# Altium PCB Power.PcbDoc
Units mm, origin at the board's own origin, x right, y up, seen from the top; angles counter-clockwise.
Board outline 232.5 x 115 mm, 2 copper layers (Top Layer, Bottom Layer); 44 components, 32 nets, 226 pads, 10 vias.
Unrouted connection lines stored in the file: 38.
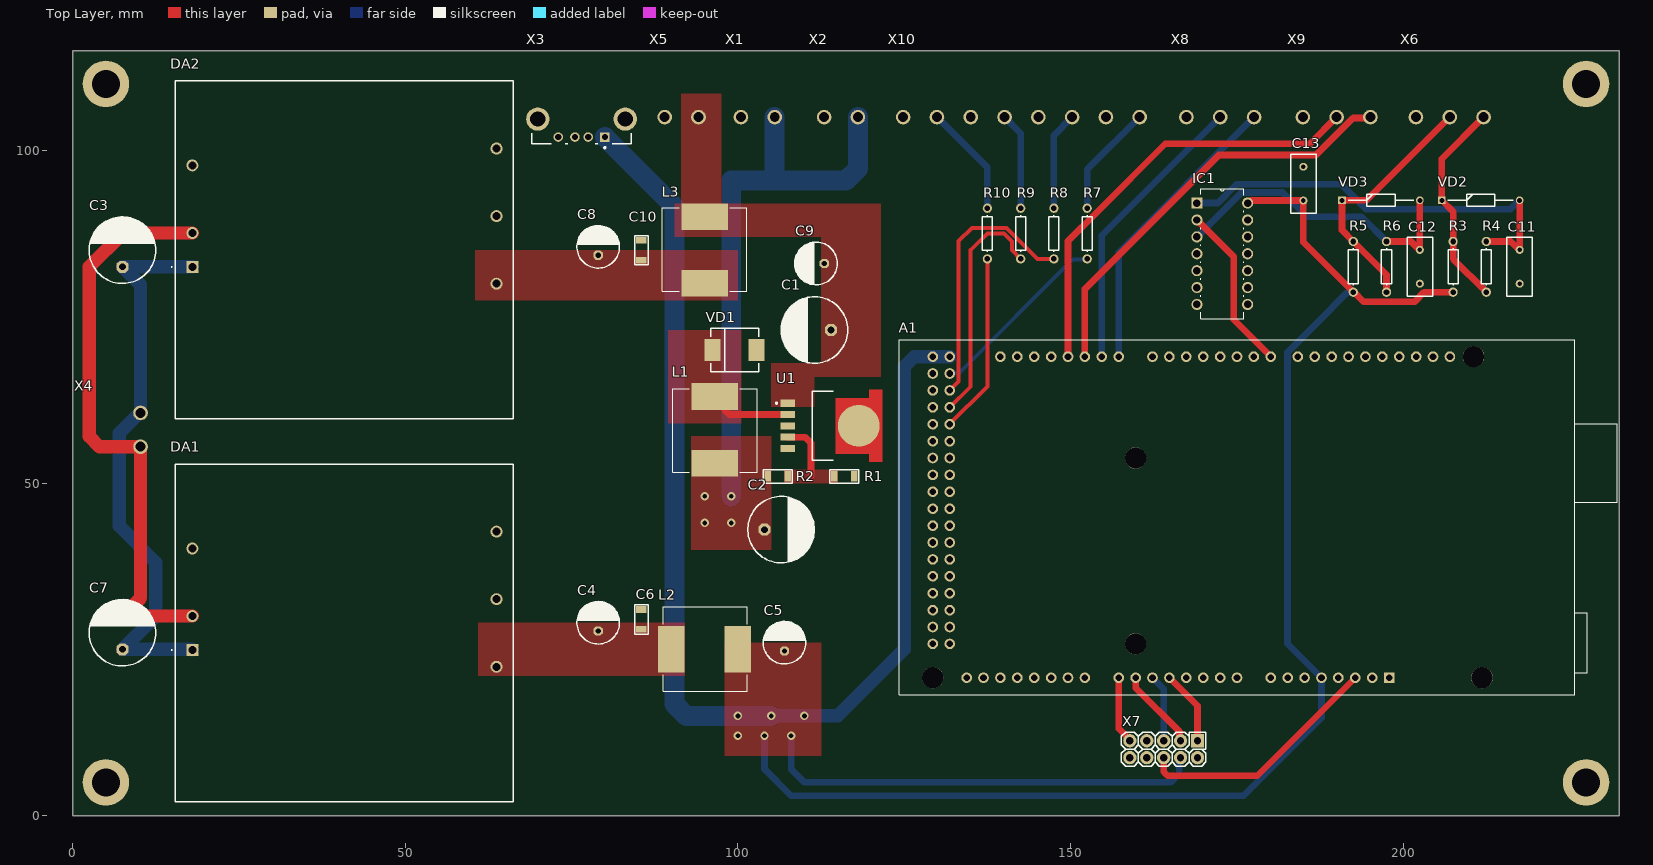
[diagram p0: Top Layer view]
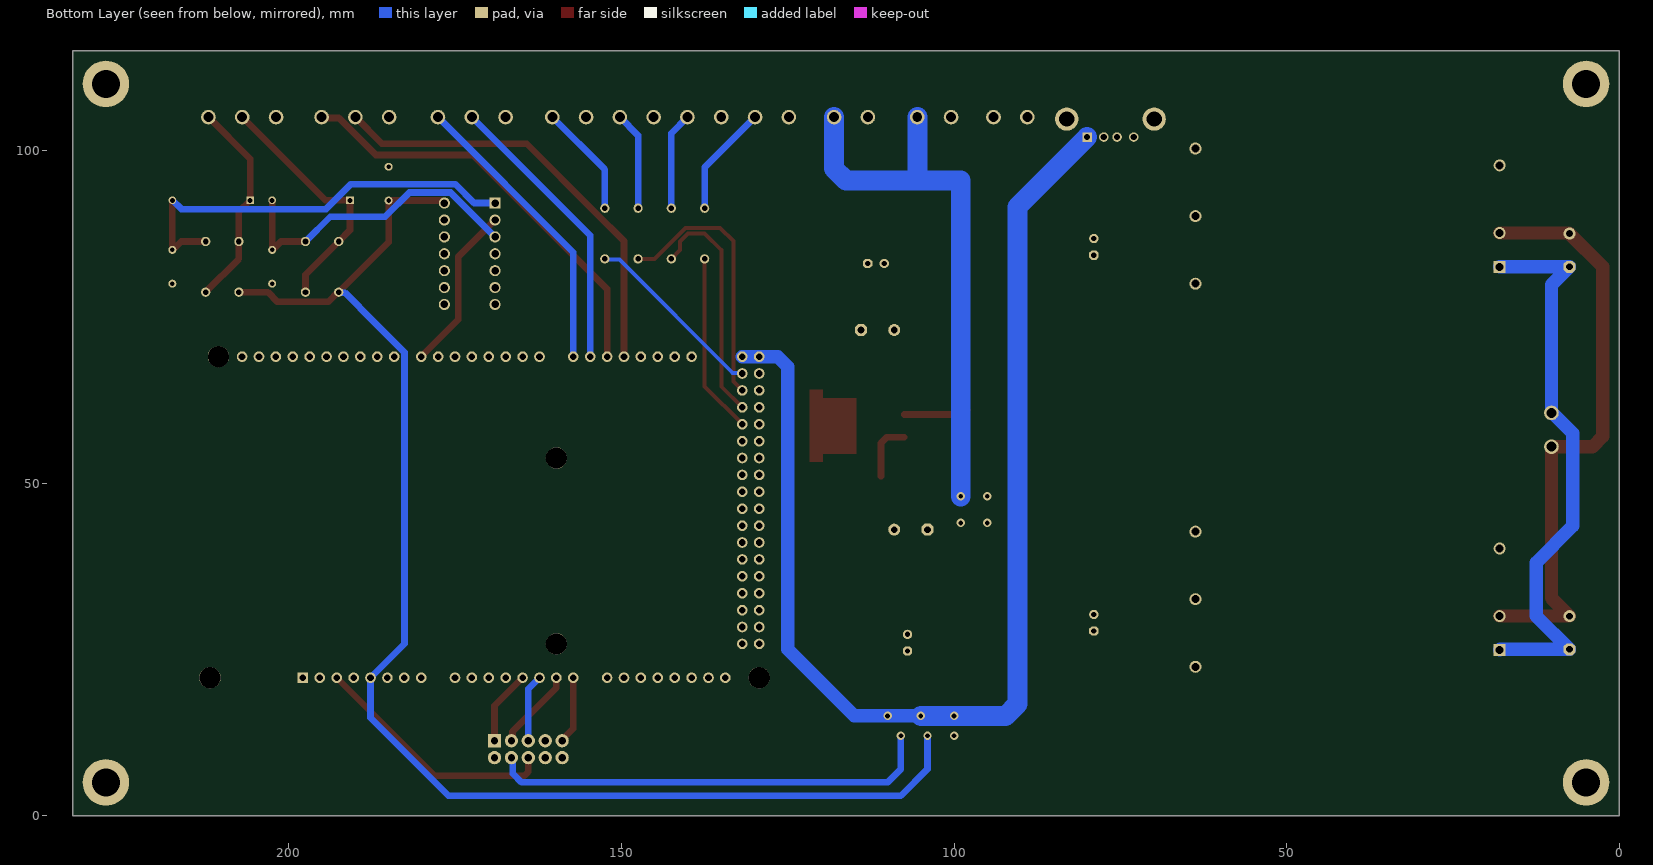
[diagram p1: Bottom Layer view, seen from below]

## Layer stack, top to bottom
Top Solder: solder mask 0.0102, Solder Resist, Dk 3.5
Top Layer: signal copper 0.0356
Dielectric 1: dielectric 0.32, FR-4, Dk 4.8
Bottom Layer: signal copper 0.0356
Bottom Solder: solder mask 0.0102, Solder Resist, Dk 3.5

## Board outline
0,0 232.5,0 232.5,115 0,115

## Design rules (kind name [scope] priority, off if disabled: settings)
Clearance [All] p1: gap=0.254 ignorepadtopadclearanceinfootprint=FALSE except(0: Arc-Hole Track-Hole SMDPad-Hole THPad-Hole Via-Hole Fill-Hole Poly-Hole Region-Hole Text-Hole)
PolygonConnect [All] p1: connectstyle=Direct reliefconductorwidth=0.254 reliefentries=4 polygonreliefangle="90 Angle" airgapwidth=0.254
RoutingVias [All] p1: holewidth=0.711 width=1.27 viastyle="Through Hole" minholewidth=0.711 minwidth=1.27 maxholewidth=0.711 maxwidth=1.27
SolderMaskExpansion [All] p1: expansion=0.102 istentingtop=FALSE
Width [All] p1: maxlimit=5 minlimit=0.1 preferedwidth=0.3
30 further rules are at their usual default settings.

## Classes and differential pairs
component class MCU: A1 C11 C12 C13 IC1 R3 R4 R5 R6 R7 R8 R9 R10 VD2 VD3 X6 X7 X8 X9 X10
component class Power: C1 C2 C3 C4 C5 C6 C7 C8 C9 C10 DA1 DA2 L1 L2 L3 R1 R2 U1 VD1 X1 X2 X3 X4 X5

## Components (designator, comment, footprint, x,y, rotation, side; value= is the part's Value field where it differs from the comment)
A1 "ARDUINO_MEGA_2560_REV3_A000067_1" ARDUINO_ARDUINO_MEGA_2560_REV3_A000067 175.52,43.87 r270 top
C1 "Aluminium capacitor, 680μF, 25V, ±20%, 54mOhm, 14x10x5 mm, -55...+105°C" "CAP: D10C5H16" 111.5,73 r180 top value=680μF
C2 "Aluminium capacitor, 220μF, 25V, ±20%, 54mOhm, 14x10x5 mm, -55...+105°C" "CAP: D10C5H16" 106.5,43 r0 top value=220μF
C3 "Aluminium capacitor, 680μF, 25V, ±20%, 54mOhm, 14x10x5 mm, -55...+105°C" "CAP: D10C5H16" 7.5,85 r90 top value=680μF
C4 "Aluminium capacitor, 330μF, 25V, ±20%, 54mOhm, 14x10x5 mm, -55...+105°C" "CAP: D6.3C2.5H11" 79,29 r90 top value=330μF
C5 "Aluminium capacitor, 330μF, 25V, ±20%, 54mOhm, 14x10x5 mm, -55...+105°C" "CAP: D6.3C2.5H11" 107,26 r90 top value=330μF
C6 "Ceramic capacitor, 0.1μF, X7R, ±10%, 50V, 1206, -55...+125°C" "CAP: 1206" 85.5,29.5 r270 top value=0.1μF
C7 "Aluminium capacitor, 680μF, 25V, ±20%, 54mOhm, 14x10x5 mm, -55...+105°C" "CAP: D10C5H16" 7.5,27.5 r90 top value=680μF
C8 "Aluminium capacitor, 330μF, 25V, ±20%, 54mOhm, 14x10x5 mm, -55...+105°C" "CAP: D6.3C2.5H11" 79,85.5 r90 top value=330μF
C9 "Aluminium capacitor, 330μF, 25V, ±20%, 54mOhm, 14x10x5 mm, -55...+105°C" "CAP: D6.3C2.5H11" 111.75,83 r180 top value=330μF
C10 "Ceramic capacitor, 0.1μF, X7R, ±10%, 50V, 1206, -55...+125°C" "CAP: 1206" 85.5,85 r270 top value=0.1μF
C11 "Ceramic capacitor, 1μF, X7R, ±10%, 50V, 1206, -55...+125°C" RAD-0.2 217.5,82.5 r270 top value=1μF
C12 "Ceramic capacitor, 1μF, X7R, ±10%, 50V, 1206, -55...+125°C" RAD-0.2 202.5,82.5 r270 top value=1μF
C13 "Ceramic capacitor, 0.1μF, X7R, ±10%, 50V, 1206, -55...+125°C" RAD-0.2 185,95 r270 top value=0.1μF
DA1 "SDM30-24S5" SDM3024S5 18,24.92 r270 top
DA2 "SDM30-24S12" SDM3024S12 18,82.5 r270 top
IC1 "74HC14N,652" DIP254P762X420-14 176.62,76.84 r0 top
L1 "Fixed inductor, 100μH, ±20%, SDR0403, 1.7A, -40...+125°C" SRR1208-101YL 96.5,58 r90 top value=100μH
L2 "Fixed inductor, 100μH, ±20%, SDR0403, 1.7A, -40...+125°C" SRR1208-101YL 95,25 r180 top value=100μH
L3 "Fixed inductor, 100μH, ±20%, SDR0403, 1.7A, -40...+125°C" SRR1208-101YL 95,85 r270 top value=100μH
R1 "Resistor film, 100R, ±5%, 1206, 0.25W, -55...+125°C" "RES: 1206" 116,51 r180 top value=100R
R2 "Resistor film, 100R, ±5%, 1206, 0.25W, -55...+125°C" "RES: 1206" 106,51 r180 top value=100R
R3 "Resistor film, 51k, , 1206, 0.25W, -55...+125°C" AXIAL-0.3 207.5,82.5 r270 top value=51k
R4 "Resistor film, 22k, , 1206, 0.25W, -55...+125°C" AXIAL-0.3 212.5,82.5 r270 top value=22k
R5 "Resistor film, 51k, , 1206, 0.25W, -55...+125°C" AXIAL-0.3 192.5,82.5 r270 top value=51k
R6 "Resistor film, 22k, , 1206, 0.25W, -55...+125°C" AXIAL-0.3 197.5,82.5 r270 top value=22k
R7 "Resistor film, 220R, , 1206, 0.25W, -55...+125°C" AXIAL-0.3 152.5,87.5 r90 top value=220R
R8 "Resistor film, 220R, , 1206, 0.25W, -55...+125°C" AXIAL-0.3 147.5,87.5 r90 top value=220R
R9 "Resistor film, 220R, , 1206, 0.25W, -55...+125°C" AXIAL-0.3 142.5,87.5 r90 top value=220R
R10 "Resistor film, 220R, , 1206, 0.25W, -55...+125°C" AXIAL-0.3 137.5,87.5 r90 top value=220R
U1 "LM2596SX-12/NOPB" FP-KTT0005B-MFG 115.63,58.6 r270 top
VD1 "Schottky diode, 80V, 500mA, 1V, 15pF, SOD-123, -55...+150°C" "DIODE: SMC" 99.5,70 r180 top
VD2 "Single diode, 75V, 150mA, 1V, 4ns, SOD-323, -55...+150°C" DIOAD1165W56L425D185 205.8,92.5 r0 top
VD3 "Single diode, 75V, 150mA, 1V, 4ns, SOD-323, -55...+150°C" DIOAD1165W56L425D185 190.8,92.5 r0 top
X1 "Connector, 6pin, 2.54mm, 500VAC, 3A" 2EDGR-5.08-02P 103,105 r180 top
X2 "Connector, 6pin, 2.54mm, 500VAC, 3A" 2EDGR-5.08-02P 115.5,105 r180 top
X3 "USB micro B" FP-292303-4-MFG 76.5,107.99 r180 top
X4 "Connector, 6pin, 2.54mm, 500VAC, 3A" 2EDGR-5.08-02P 10.21,58 r270 top
X5 "Connector, 6pin, 2.54mm, 500VAC, 3A" 2EDGR-5.08-02P 91.54,105 r180 top
X6 "Connector, 6pin, 2.54mm, 500VAC, 3A" 2EDGR-5.08-03P 207,105 r180 top
X7 "Connector, 10pin, 2.54mm, 500VAC, 3A" "CON: PLD-10" 164,10 r180 top
X8 "Connector, 6pin, 2.54mm, 500VAC, 3A" 2EDGR-5.08-03P 172.5,105 r180 top
X9 "Connector, 6pin, 2.54mm, 500VAC, 3A" 2EDGR-5.08-03P 190,105 r180 top
X10 "Connector, 6pin, 2.54mm, 500VAC, 3A" 2EDGR-5.08-08P 142.62,105 r180 top

## Footprints (in the part's own frame and the unit in brackets; to place one, negate y for a bottom-side part, rotate by r counter-clockwise, add the part's x,y. Pads: shape width x height; smd on the part's side, far side on the other; paste and mask are expansions set on the pad)
2EDGR-5.08-02P [mm]
  round 2.2 hole 1.5: 1(-2.54,0) 2(2.54,0)
  body extent -5.08,-9.81 5.08,2.19, height 9.05
2EDGR-5.08-03P [mm]
  round 2.2 hole 1.5: 1(-5.08,0) 2(0,0) 3(5.08,0)
  body extent -7.62,-9.9 7.62,2.1, height 9
2EDGR-5.08-08P [mm]
  round 2.2 hole 1.5: 1(-17.78,0) 2(-12.7,0) 3(-7.62,0) 4(-2.54,0) 5(2.54,0) 6(7.62,0) 7(12.7,0) 8(17.78,0)
  body extent -20.33,-9.89 20.31,2.11, height 9
ARDUINO_ARDUINO_MEGA_2560_REV3_A000067 [mm]
  round 1.6 hole 1: 0(-25.13,-13.2) 1(-25.13,-10.66) 2(-25.13,-8.12) 3(-25.13,-5.58) 3V3(23.13,14.74) 4(-25.13,-3.04) 5(-25.13,-0.5) 5V_1(23.13,12.2) 5V_2(-25.13,-43.68) 5V_3(-25.13,-46.22) 6(-25.13,2.04) 7(-25.13,4.58) 8(-25.13,8.644) 9(-25.13,11.184) 10(-25.13,13.724) 11(-25.13,16.264) 12(-25.13,18.804) 13(-25.13,21.344) 14(-25.13,-18.28) 15(-25.13,-20.82) 16(-25.13,-23.36) 17(-25.13,-25.9) 18(-25.13,-28.44) 19(-25.13,-30.98) 20(-25.13,-33.52) 21(-25.13,-36.06) 22(-22.59,-43.68) 23(-22.59,-46.22) 24(-20.05,-43.68) 25(-20.05,-46.22) 26(-17.51,-43.68) 27(-17.51,-46.22) 28(-14.97,-43.68) 29(-14.97,-46.22) 30(-12.43,-43.68) 31(-12.43,-46.22) 32(-9.89,-43.68) 33(-9.89,-46.22) 34(-7.35,-43.68) 35(-7.35,-46.22) 36(-4.81,-43.68) 37(-4.81,-46.22) 38(-2.27,-43.68) 39(-2.27,-46.22) 40(0.27,-43.68) 41(0.27,-46.22) 42(2.81,-43.68) 43(2.81,-46.22) 44(5.35,-43.68) 45(5.35,-46.22) 46(7.89,-43.68) 47(7.89,-46.22) 48(10.43,-43.68) 49(10.43,-46.22) 50(12.97,-43.68) 51(12.97,-46.22) 52(15.51,-43.68) 53(15.51,-46.22) AD0(23.13,-0.5) AD1(23.13,-3.04) AD2(23.13,-5.58) AD3(23.13,-8.12) AD4(23.13,-10.66) AD5(23.13,-13.2) AD6(23.13,-15.74) AD7(23.13,-18.28) AD8(23.13,-23.36) AD9(23.13,-25.9) AD10(23.13,-28.44) AD11(23.13,-30.98) AD12(23.13,-33.52) AD13(23.13,-36.06) AD14(23.13,-38.6) AD15(23.13,-41.14) AREF(-25.13,26.424) GND(-25.13,23.884) GND(23.13,9.66) GND(23.13,7.12) GND4(18.05,-43.68) GND5(18.05,-46.22) IOREF(23.13,19.82) RESET(23.13,17.28) SCL(-25.13,31.504) SDA(-25.13,28.964) VIN(23.13,4.58)
  rect 1.6x1.6 hole 1: NC(23.13,22.36)
  round 3.2 hole 3.2 unplated: ""(-25.13,35.06) ""(-9.89,-15.74) ""(18.05,-15.74) ""(23.13,36.33) ""(23.13,-46.22)
  silkscreen extent -27.67,-51.3 25.67,56.65, body extent -26.4,-47.49 24.4,32.77, height 8.6
AXIAL-0.3 [mm] "Axial Device, Thru-Hole; 2 Leads; 0.3 in Pin Spacing"
  round 1.4 hole 0.85: 1(-3.81,0) 2(3.81,0)
  silkscreen extent -2.77,-0.76 2.77,0.76
"CAP: 1206" [mm]
  rect 1x1.6 smd: 1(-1.5,0) 2(1.5,0)
  silkscreen extent -2.2,-1 2.2,1, body extent -1.6,-0.8 1.6,0.8, height 1
"CAP: D6.3C2.5H11" [mm]
  oct 1.4x1.4 hole 0.8: 1(-1.25,0)
  round 1.4 hole 0.8: 2(1.25,0)
  silkscreen extent -3.2,-3.2 3.2,3.2, body extent -3.4,-3.4 3.4,3.4, height 12.5
"CAP: D10C5H16" [mm]
  oct 1.8x1.8 hole 1: 1(-2.5,0)
  round 1.8 hole 1: 2(2.5,0)
  silkscreen extent -5,-5 5,5, body extent -5.25,-5.25 5.25,5.25, height 17.55
"CON: PLD-10" [mm]
  rect 2x2 hole 1.1: 1(-5.08,-1.27)
  round 2 hole 1.1: 2(-5.08,1.27) 3(-2.54,-1.27) 4(-2.54,1.27) 5(0,-1.27) 6(0,1.27) 7(2.54,-1.27) 8(2.54,1.27) 9(5.08,-1.27) 10(5.08,1.27)
  silkscreen extent -6.35,-2.54 6.35,2.54, body extent -6.35,-2.54 6.35,2.54, height 8.54
DIOAD1165W56L425D185 [mm]
  rect 1.15x1.15 hole 0.75: 1(0,0)
  round 1.15 hole 0.75: 2(11.7,0)
  silkscreen extent 0.92,-0.92 10.78,0.92
"DIODE: SMC" [mm]
  rect 2.4x3.3 smd: 1(-3.3,0) 2(3.3,0)
  silkscreen extent -3.6,-3.3 3.6,3.3, body extent -4.06,-3.15 4.06,3.15, height 2.67
DIP254P762X420-14 [mil]
  rect 66x66 hole 44: 1(-300,600)
  round 66 hole 44: 2(-300,500) 3(-300,400) 4(-300,300) 5(-300,200) 6(-300,100) 7(-300,0) 8(0,0) 9(0,100) 10(0,200) 11(0,300) 12(0,400) 13(0,500) 14(0,600)
  silkscreen extent -278,-84 -22,684, body extent -332,-68 32,680, height 151
FP-292303-4-MFG [mm]
  rect 1.42x1.42 hole 0.92 paste-1000 mask+0: 1(-3.5,5.99)
  round 1.42 hole 0.92 paste-1000 mask+0: 2(-1,5.99) 3(1,5.99) 4(3.5,5.99)
  round 3.5 hole 2.3 paste-1000 mask+0: 5(-6.57,3.28) 6(6.57,3.28)
  silkscreen extent -7.47,5.4 7.47,7.71, body extent -8.42,-7.1 8.42,7.1, height 0.25
FP-KTT0005B-MFG [mm]
  rect 1.07x2.16 smd paste+0 mask+0: 1(-3.4,-8.13) 2(-1.7,-8.13) 3(0,-8.13) 4(1.7,-8.13) 5(3.4,-8.13)
  round 6.291 smd paste+0 mask+0: 6(0,2.545)
  Top Layer region: -5.4,6.04 5.4,6.04 5.4,4.13 4.165,4.13 4.165,-0.95 -4.165,-0.95 -4.165,4.13 -5.4,4.13 -5.4,6.04
  silkscreen extent -5.21,-9.95 5.21,-1.33, body extent -5.5,-9.31 5.5,6.14, height 0.25
RAD-0.2 [mm] "Radial Cap, Thru-Hole; 2 Leads; 0.2 in Pin Spacing"
  round 1.2 hole 0.7: 1(-2.54,0) 2(2.54,0)
  silkscreen extent -4.44,-1.91 4.44,1.91
"RES: 1206" [mm]
  rect 1x1.6 smd: 1(-1.5,0) 2(1.5,0)
  silkscreen extent -2.2,-1 2.2,1, body extent -1.65,-0.8 1.55,0.8, height 0.47
SDM3024S5 [mm]
  rect 1.8x1.8 hole 1.2: 1(0,0)
  round 1.8 hole 1.2: 2(-5.08,0) 4(-15.24,0) 6(2.54,45.72) 7(-7.62,45.72) 8(-17.78,45.72)
  silkscreen extent -27.94,-3.15 22.86,48.26, body extent -27.94,-2.54 22.86,48.26, height 16
SDM3024S12 [mm]
  rect 1.8x1.8 hole 1.2: 1(0,0)
  round 1.8 hole 1.2: 2(-5.08,0) 4(-15.24,0) 6(2.54,45.72) 7(-7.62,45.72) 8(-17.78,45.72)
  silkscreen extent -27.94,-3.15 22.86,48.26, body extent -27.94,-2.54 22.86,48.26, height 16
SRR1208-101YL [mm]
  rect 4x7 smd: 1(-5,0) 2(5,0)
  silkscreen extent -6.4,-6.4 6.2,6.3, body extent -6.35,-6.4 6.35,6.3, height 8.5

## Part data
A1: "ATmega2560 Arduino Mega2560 AVR® ATmega AVR MCU 8-Bit Embedded Evaluation Board", Package="Non-Standard Arduino", Check_prices=https://www.snapeda.com/parts/ARDUINO%20MEGA%202560%20REV3%20%7C%20A000067/Arduino/view-part/?ref=eda, MF=Arduino, MP="ARDUINO MEGA 2560 REV3 | A000067", SnapEDA_Link=https://www.snapeda.com/parts/ARDUINO%20MEGA%202560%20REV3%20%7C%20A000067/Arduino/view-part/?ref=snap
C1 C2 C3 C4 C5 C7 C8 C9: library part Aluminium, Manufacturer=Wurth, Package="14x10x5 mm", PartNumber=860080475013, Temperature=-55...+105°C, Tolerance=±20%, TypeCapacitor="Aluminium capacitor", Voltage=25V, HelpURL=https://www.digikey.com/product-detail/en/wurth-electronics-inc/860080475013/732-9029-1-ND/5728972, Impedance=54mOhm
  C1 C3 C7: ValueManufacturerPartNumber="Aluminium capacitor, 680μF, 25V, ±20%, 54mOhm, 14x10x5 mm, -55...+105°C"
  C2: ValueManufacturerPartNumber="Aluminium capacitor, 220μF, 25V, ±20%, 54mOhm, 14x10x5 mm, -55...+105°C"
  C4 C5 C8 C9: ValueManufacturerPartNumber="Aluminium capacitor, 330μF, 25V, ±20%, 54mOhm, 14x10x5 mm, -55...+105°C"
C6 C10 C11 C12 C13: library part Ceramic_1206, Manufacturer=Yageo, Package=1206, PartNumber=CC1206KRX7R9BB104, Temperature=-55...+125°C, Tolerance=±10%, TypeCapacitor="Ceramic capacitor", TypeDielectric=X7R, Voltage=50V, HelpURL=https://www.digikey.com/product-detail/en/yageo/CC1206KRX7R9BB104/311-1179-1-ND/303089
  C6 C10 C13: ValueManufacturerPartNumber="Ceramic capacitor, 0.1μF, X7R, ±10%, 50V, 1206, -55...+125°C"
  C11 C12: ValueManufacturerPartNumber="Ceramic capacitor, 1μF, X7R, ±10%, 50V, 1206, -55...+125°C"
DA1 DA2: "Power Supply", Manufacturer_Name="Mean Well", Datasheet Link=https://meanwell.hu/userfiles/webshop/products/attachments/SDM30-24S5.pdf, Height=16mm
  DA1: Manufacturer_Part_Number=SDM30-24S5
  DA2: Manufacturer_Part_Number=SDM30-24S12
IC1: "Integrated Circuit", Manufacturer_Name=Nexperia, Arrow Part Number=74HC14N,652, Arrow Price/Stock=https://www.arrow.com/en/products/74hc14n652/nexperia, Manufacturer_Part_Number=74HC14N,652
L1 L2 L3: library part Inductor_SDR0403, Manufacturer=Bourns, MaxCurrent=1.7A, Package=SDR0403, PartNumber=SDR0403-4R7ML, Temperature=-40...+125°C, Tolerance=±20%, TypeInductor="Fixed inductor", HelpURL=https://www.digikey.com/product-detail/en/bourns-inc/SDR0403-4R7ML/SDR0403-4R7MLCT-ND/2127096, ValueManufacturerPartNumber="Fixed inductor, 100μH, ±20%, SDR0403, 1.7A, -40...+125°C"
R1 R2: library part Resistor_1206, Manufacturer=Yageo, Package=1206, PartNumber=RC1206JR-07100RL, Power=0.25W, Temperature=-55...+125°C, Tolerance=±5%, TypeResistor="Resistor film", HelpURL=https://www.digikey.com/product-detail/en/yageo/RC1206JR-07100RL/311-100ERCT-ND/732153, ValueManufacturerPartNumber="Resistor film, 100R, ±5%, 1206, 0.25W, -55...+125°C"
R3 R4 R5 R6 R7 R8 R9 R10: library part Resistor_1206, Manufacturer=Yageo, Package=1206, PartNumber=RC1206JR-07100RL, Power=0.25W, Temperature=-55...+125°C, TypeResistor="Resistor film", HelpURL=https://www.digikey.com/product-detail/en/yageo/RC1206JR-07100RL/311-100ERCT-ND/732153
  R3 R5: ValueManufacturerPartNumber="Resistor film, 51k, , 1206, 0.25W, -55...+125°C"
  R4 R6: ValueManufacturerPartNumber="Resistor film, 22k, , 1206, 0.25W, -55...+125°C"
  R7 R8 R9 R10: ValueManufacturerPartNumber="Resistor film, 220R, , 1206, 0.25W, -55...+125°C"
U1: library part CMP-04918-000013-1, "IC REG BUCK 12V 3A TO263-5", Manufacturer="Texas Instruments", Max Junction Temp=+150°C, Max Supply Voltage=40V, Min Supply Voltage=4.5V, Nominal Supply Current=5mA, Output Current=3A, Output Voltage=12V, Package=KTT0005B, Switching Frequency=150kHz, Temperature="-40°C to +125°C", Temperature Range High=+125°C, Temperature Range Low=-40°C, Automotive=No, Category=IC, ComponentLink2Description=Datasheet, ComponentLink2URL=http://www.ti.com/lit/ds/symlink/lm2596.pdf, Device Class L1="Integrated Circuits (ICs)", Device Class L2="Power Management ICs", Device Class L3="Voltage Regulators - Switching", Digikey Description="IC REG BUCK 12V 3A TO263-5", Height=4.8mm, Lead Free=Yes, Manufacturer Part Number=LM2596SX-12/NOPB, Max Duty Cycle=100%, Mouser Description="SIMPLE SWITCHER® 4.5V to 40V, 3A Low Component Count Step-Down Regulator 5-DDPAK/TO-263", Number of Outputs=1, Octopart=https://octopart.com/lm2596sx-12%2Fnopb-texas+instruments-24812942, Output Type=Fixed, RoHS=TRUE, Standoff Height=0mm, Switching Topology=Buck
VD1: library part Schottky_single, Current=500mA, Manufacturer="Diodes Incorporated", Package=SOD-123, PartNumber=SK34, Temperature=-55...+150°C, Voltage=80V, VoltageDrop=1V, HelpURL=https://www.digikey.com/product-detail/en/diodes-incorporated/MBR0580S1-7/MBR0580S1-7DICT-ND/5080371, RecoveryTime=15pF, TypeDiode="Schottky diode", ValueManufacturerPartNumber="Schottky diode, 80V, 500mA, 1V, 15pF, SOD-123, -55...+150°C"
VD2 VD3: library part Diode_single, Current=150mA, Manufacturer="Micro Commercial", Package=SOD-323, PartNumber=1N4148WX-TP, Temperature=-55...+150°C, Voltage=75V, VoltageDrop=1V, HelpURL=https://www.digikey.com/product-detail/en/micro-commercial-co/1N4148WX-TP/1N4148WXTPMSCT-ND/717312, RecoveryTime=4ns, TypeDiode="Single diode", ValueManufacturerPartNumber="Single diode, 75V, 150mA, 1V, 4ns, SOD-323, -55...+150°C"
X1 X2 X4 X5: library part 2EDGR-5.08-02P, CurrentMax=3A, Manufacturer=Connfly, PartNumber=PBS-6, VoltageMax=500VAC, CommentText="\"Разъем\"", HelpURL=https://www.chipdip.ru/product/pbs-6, Multichannel=6pin, Pitch=2.54mm, TypeConnector=Connector, ValueManufacturerPartNumber="Connector, 6pin, 2.54mm, 500VAC, 3A"
X3: library part Connector_USB_micro_B, Manufacturer="Hirose Electric", PartNumber=ZX62-B-5PA, CommentText="\"USB\"", HelpURL=https://www.digikey.com/product-detail/en/hirose-electric-co-ltd/ZX62-B-5PA/H11579CT-ND/1851090, TypeConnector="USB micro B", ValueManufacturerPartNumber="USB micro B"
X6 X8 X9: library part 2EDGR-5.08-03P, CurrentMax=3A, Manufacturer=Connfly, PartNumber=PBS-6, VoltageMax=500VAC, CommentText="\"Разъем\"", HelpURL=https://www.chipdip.ru/product/pbs-6, Multichannel=6pin, Pitch=2.54mm, TypeConnector=Connector, ValueManufacturerPartNumber="Connector, 6pin, 2.54mm, 500VAC, 3A"
X7: library part PLD-10, CurrentMax=3A, Manufacturer=Connfly, VoltageMax=500VAC, CommentText="\"Разъем\"", HelpURL=https://www.chipdip.ru/product/pld-10, Multichannel=10pin, PartNumber=PLD-10, Pitch=2.54mm, TypeConnector=Connector, ValueManufacturerPartNumber="Connector, 10pin, 2.54mm, 500VAC, 3A"
X10: library part 2EDGR-5.08-08P, CurrentMax=3A, Manufacturer=Connfly, PartNumber=PBS-6, VoltageMax=500VAC, CommentText="\"Разъем\"", HelpURL=https://www.chipdip.ru/product/pbs-6, Multichannel=6pin, Pitch=2.54mm, TypeConnector=Connector, ValueManufacturerPartNumber="Connector, 6pin, 2.54mm, 500VAC, 3A"

## Free pads (board coordinates)
  round 7 hole 4.2: 2(5,5) 2(5,110) 2(227.5,5) 2(227.5,110)

## Via types
v1: diameter 1.27, hole 0.711, Top Layer to Bottom Layer, 10 vias

## Nets (pads, with @x,y where several pads share a name; then routed paths per layer and width w, separated by ;. In a path a pad name is that pad's centre, name@x,y a point inside that pad or via, vN(x,y) a via of type N, cw(c..) or ccw(c..) an arc to the next point about the centre after c; other vN are vias at no path point)
+5: A1.5V_1 A1.5V_2 A1.5V_3 C5.1 C13.2 IC1.14 L2.1 R3.2 R5.2 X3.1 X7.4 | length 453.6
  Top Layer w1: IC1.14 176.803,92.08 177.183,92.46 C13.2 185,86.19 R5.2 192.608,78.69 194.062,77.236 201.691,77.236 203.145,78.69 R3.2
  Bottom Layer w1: v1(104,12) 104,7 108,3 176,3 187.72,14.72 A1.5V_1 182.61,25.85 182.61,69.644 187.095,74.129 191.58,78.613 192.423,78.613 R5.2 ; v1(108,12) 108,7 110,5 165,5 166.349,6.349 166.349,8.539 X7.4
  Bottom Layer w2: v1(105,15) v1(110,15) 115,15 125,25 125,67.5 126.5,69 A1.5V_3 A1.5V_2
  Bottom Layer w3: X3.1 90.5,91.5 90.5,16.757 92.257,15 v1(100,15) v1(105,15)
  other v1: 100,12
+6V: C2.1 L1.1 R2.2 X1.1 X2.1 | length 84.5
  Bottom Layer w3: v1(99,48) 99,95.5 105.5,95.5 ; X1.1@105.5,105 105.5,95.5 ; X2.1 118.04,97.257 116.283,95.5 105.5,95.5
  other v1: 95,44 99,44 95,48
+12: C1.1 C9.1 L3.1 U1.1 X5.1
"+28 V": C3.1 C7.1 DA1.1 DA2.1 X4.1 | length 85.5
  Bottom Layer w2: X4.1@10.21,60.486 10.21,79.79 C3.1 DA2.1 ; X4.1 10.172,60.502 10.002,60.502 7,57.5 7,43.55 12.5,38.05 12.5,30 C7.1 17.92,25 DA1.1
GND: A1.GND A1.GND4 A1.GND5 C1.2 C2.2 C4.2 C5.2 C6.1 C8.2 C9.2 C10.1 C11.2 C12.2 C13.1 DA1.7 DA2.7 IC1.7 R1.1 U1.3 U1.5 U1.6 VD1.1 X1.2 X2.2 X3.4 X3.5 X3.6 X5.2 X6.3 X7.2 X7.10 X8.3 X9.3 X10.2 X10.4 X10.6 X10.8
NetA1_7: A1.7 IC1.2 | length 25.1
  Top Layer w1: IC1.2 174.557,83.983 174.557,74.543 A1.7
NetA1_14: A1.14 X8.1 | length 44.4
  Bottom Layer w1: A1.14 157.24,84.66 X8.1
NetA1_15: A1.15 X8.2 | length 43.4
  Bottom Layer w1: A1.15 154.7,87.2 X8.2
NetA1_16: A1.16 X9.1 | length 63.8
  Top Layer w1: A1.16 152.16,79.16 172.298,99.298 186.92,99.298 192.48,104.858 194.938,104.858 X9.1
NetA1_17: A1.17 X9.2 | length 65.5
  Top Layer w1: A1.17 149.62,86.374 153.954,90.708 164.246,101 186,101 X9.2
NetA1_22: A1.22 R7.1 | length 27.8
  Bottom Layer w0.6: A1.22 131.955,66.575 133.277,66.575 150.315,83.613 152.423,83.613 R7.1
NetA1_24: A1.24 R8.1 | length 40.1
  Top Layer w0.6: A1.24 133.194,65.274 133.194,86.347 135.201,88.354 140.354,88.354 145.018,83.69 R8.1
NetA1_26: A1.26 R9.1 | length 35.8
  Top Layer w0.6: A1.26 135,64.54 135,85 137.5,87.5 140,87.5 141.173,86.327 141.173,85.017 R9.1
NetA1_28: A1.28 R10.1 | length 27.2
  Top Layer w0.6: A1.28 137.5,64.5 R10.1
NetA1_AD4: A1.AD4 X7.1 | length 11.2
  Top Layer w1: A1.AD4 169.08,16.52 X7.1
NetA1_AD5: A1.AD5 X7.5 | length 10.2
  Bottom Layer w1: A1.AD5 164,19.06 X7.5
NetA1_AD6: A1.AD6 X7.3 | length 12.3
  Top Layer w1: A1.AD6 159.78,19.22 166.367,12.633 166.367,11.443 X7.3
NetA1_AD7: A1.AD7 X7.9 | length 10.2
  Top Layer w1: A1.AD7 157.24,13.088 158.92,11.408 X7.9
NetA1_RESET: A1.RESET X7.6 | length 37.3
  Top Layer w1: X7.6 164,6.586 164.586,6 178.06,6 A1.RESET
NetC3_2: C3.2 C7.2 DA1.2 DA2.2 X4.2 | length 88.5
  Top Layer w2: DA1.2 C7.2 10.21,32.71 X4.2 4.04,55.46 2.5,57 2.5,82.5 C3.2 7.58,87.58 DA2.2
NetC4_1: C4.1 C6.2 DA1.6 L2.2
NetC8_1: C8.1 C10.2 DA2.6 L3.2
NetC11_1: C11.1 IC1.1 R4.1 VD2.2 | length 64.8
  Top Layer w1: R4.1 216.176,86.31 217.446,85.04 C11.1 VD2.2
  Bottom Layer w1: IC1.1 172.145,92.08 174.992,94.926 190.657,94.926 194.412,91.171 216.13,91.171 217.459,92.5 VD2.2
NetC12_1: C12.1 IC1.3 R6.1 VD3.2 | length 47.3
  Top Layer w1: R6.1 201.176,86.31 202.446,85.04 C12.1 VD3.2
  Bottom Layer w1: IC1.3 175.672,93.672 181.873,93.672 185.516,90.029 193.781,90.029 R6.1
NetL1_2: L1.2 U1.2 VD1.2 | length 9.8
  Top Layer w1: 98,61 98.7,60.3 U1.2
NetR1_2: R1.2 R2.1 U1.4 | length 8.9
  Top Layer w1: U1.4 110.1,56.9 111,56 111,51
NetR3_1: R3.1 R4.2 VD2.1 X6.1 | length 31.7
  Top Layer w1: X6.1 205.8,98.72 VD2.1 207.5,90.8 R3.1 207.5,83.69 R4.2
NetR5_1: R5.1 R6.2 VD3.1 X6.2 | length 38
  Top Layer w1: R6.2 197.5,81.31 R5.1 190.8,88.01 VD3.1 194.5,92.5 X6.2
NetR7_2: R7.2 X10.1 | length 17
  Bottom Layer w1: R7.2 152.5,97.1 X10.1
NetR8_2: R8.2 X10.3 | length 14.8
  Bottom Layer w1: R8.2 147.5,102.26 X10.3
NetR9_2: R9.2 X10.5 | length 14.7
  Bottom Layer w1: X10.5 142.5,102.58 R9.2
NetR10_2: R10.2 X10.7 | length 16.8
  Bottom Layer w1: X10.7 137.5,97.42 R10.2
pads on no net: A1. A1.0 A1.1 A1.2 A1.3 A1.3V3 A1.4 A1.5 A1.6 A1.8 A1.9 A1.10 A1.11 A1.12 A1.13 A1.18 A1.19 A1.20 A1.21 A1.23 A1.25 A1.27 A1.29 A1.30 A1.31 A1.32 A1.33 A1.34 A1.35 A1.36 A1.37 A1.38 A1.39 A1.40 A1.41 A1.42 A1.43 A1.44 A1.45 A1.46 A1.47 A1.48 A1.49 A1.50 A1.51 A1.52 A1.53 A1.AD0 A1.AD1 A1.AD2 A1.AD3 A1.AD8 A1.AD9 A1.AD10 A1.AD11 A1.AD12 A1.AD13 A1.AD14 A1.AD15 A1.AREF A1.IOREF A1.NC A1.SCL A1.SDA A1.VIN DA1.4 DA1.8 DA2.4 DA2.8 IC1.4 IC1.5 IC1.6 IC1.8 IC1.9 IC1.10 IC1.11 IC1.12 IC1.13 X3.2 X3.3 X7.7 X7.8

## Polygon pours and split planes (outlines as drawn)
NetL1_2 on Top Layer "NETL1_2_L01_P003" (solid, pour order 3): 100.5,59 100.5,73 89.5,73 89.5,59
NetR1_2 on Top Layer "NETR1_2_L01_P013" (solid, pour order 13): 115,50 115,52 107,52 107,50
+6V on Top Layer "+6V_L01_P005" (solid, pour order 5): 105,57 105,40 93,40 93,57
+5 on Top Layer "+5_L01_P009" (solid, pour order 9): 112.5,9 112.5,26 98,26 98,9
NetC4_1 on Top Layer "NETC4_1_L01_P008" (solid, pour order 8): 61,21 61,29 92,29 92,21
+12 on Top Layer "+12_L01_P007" (solid, pour order 7): 91.5,108.5 97.5,108.5 97.5,88.5 91.5,88.5
+12 on Top Layer "+12_L01_P004" (solid, pour order 4): 105,61.5 105,68 121.5,68 121.5,66 111.5,66 111.5,61.5
+12 on Top Layer "+12_L01_P002" (solid, pour order 2): 121.5,67 112.5,67 112.5,92 121.5,92
+12 on Top Layer "+12_L01_P001" (solid, pour order 1): 90.5,92 90.5,87 115.5,87 115.5,92
NetC8_1 on Top Layer "NETC8_1_L01_P000" (solid, pour order 0): 60.5,77.5 100,77.5 100,85 60.5,85